# Altium PCB Local_PCB.PcbDoc
Units mm, origin at the board's own origin, x right, y up, seen from the top; angles counter-clockwise.
Board outline 96 x 76 mm, 2 copper layers (Top Layer, Bottom Layer); 18 components, 36 nets, 136 pads, 38 vias.
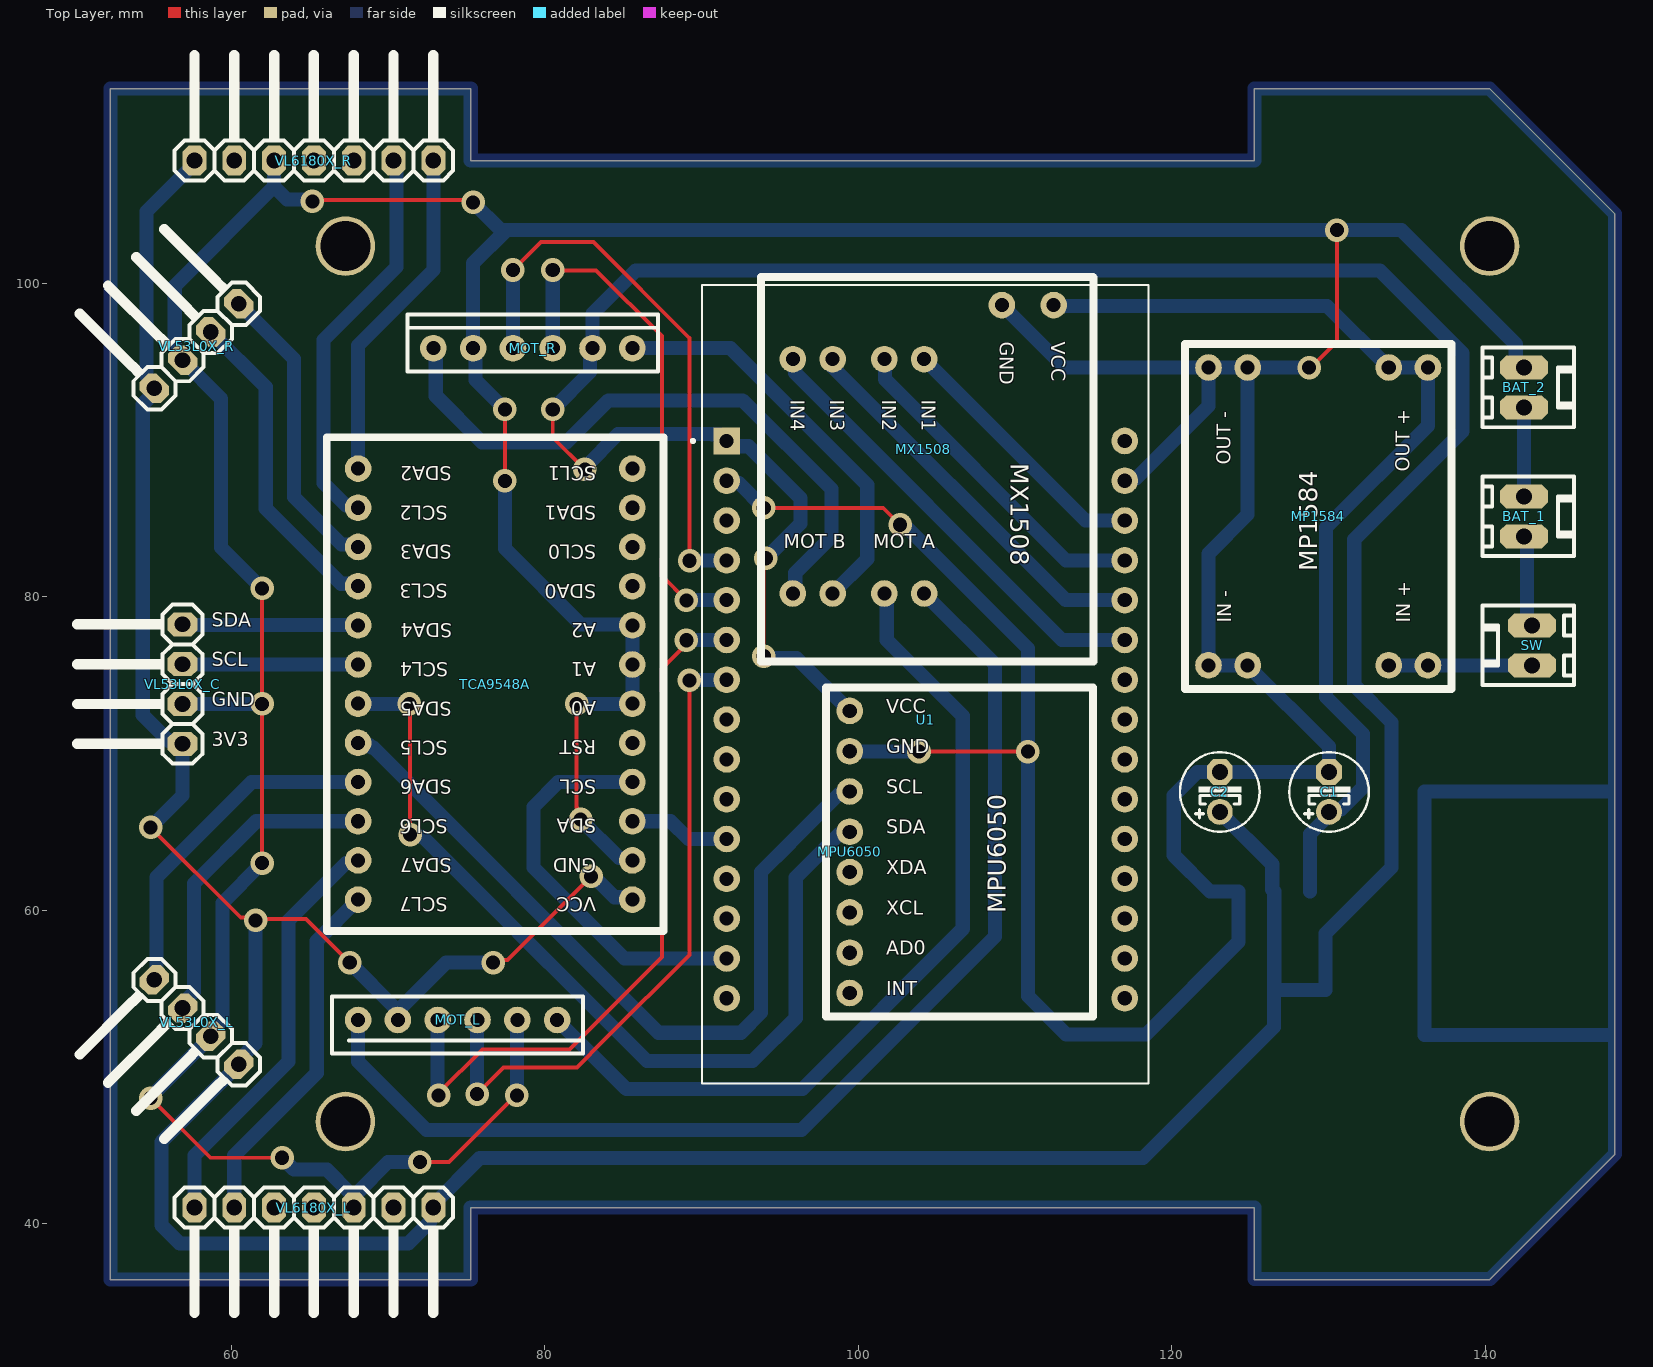
[diagram p0: Top Layer view]
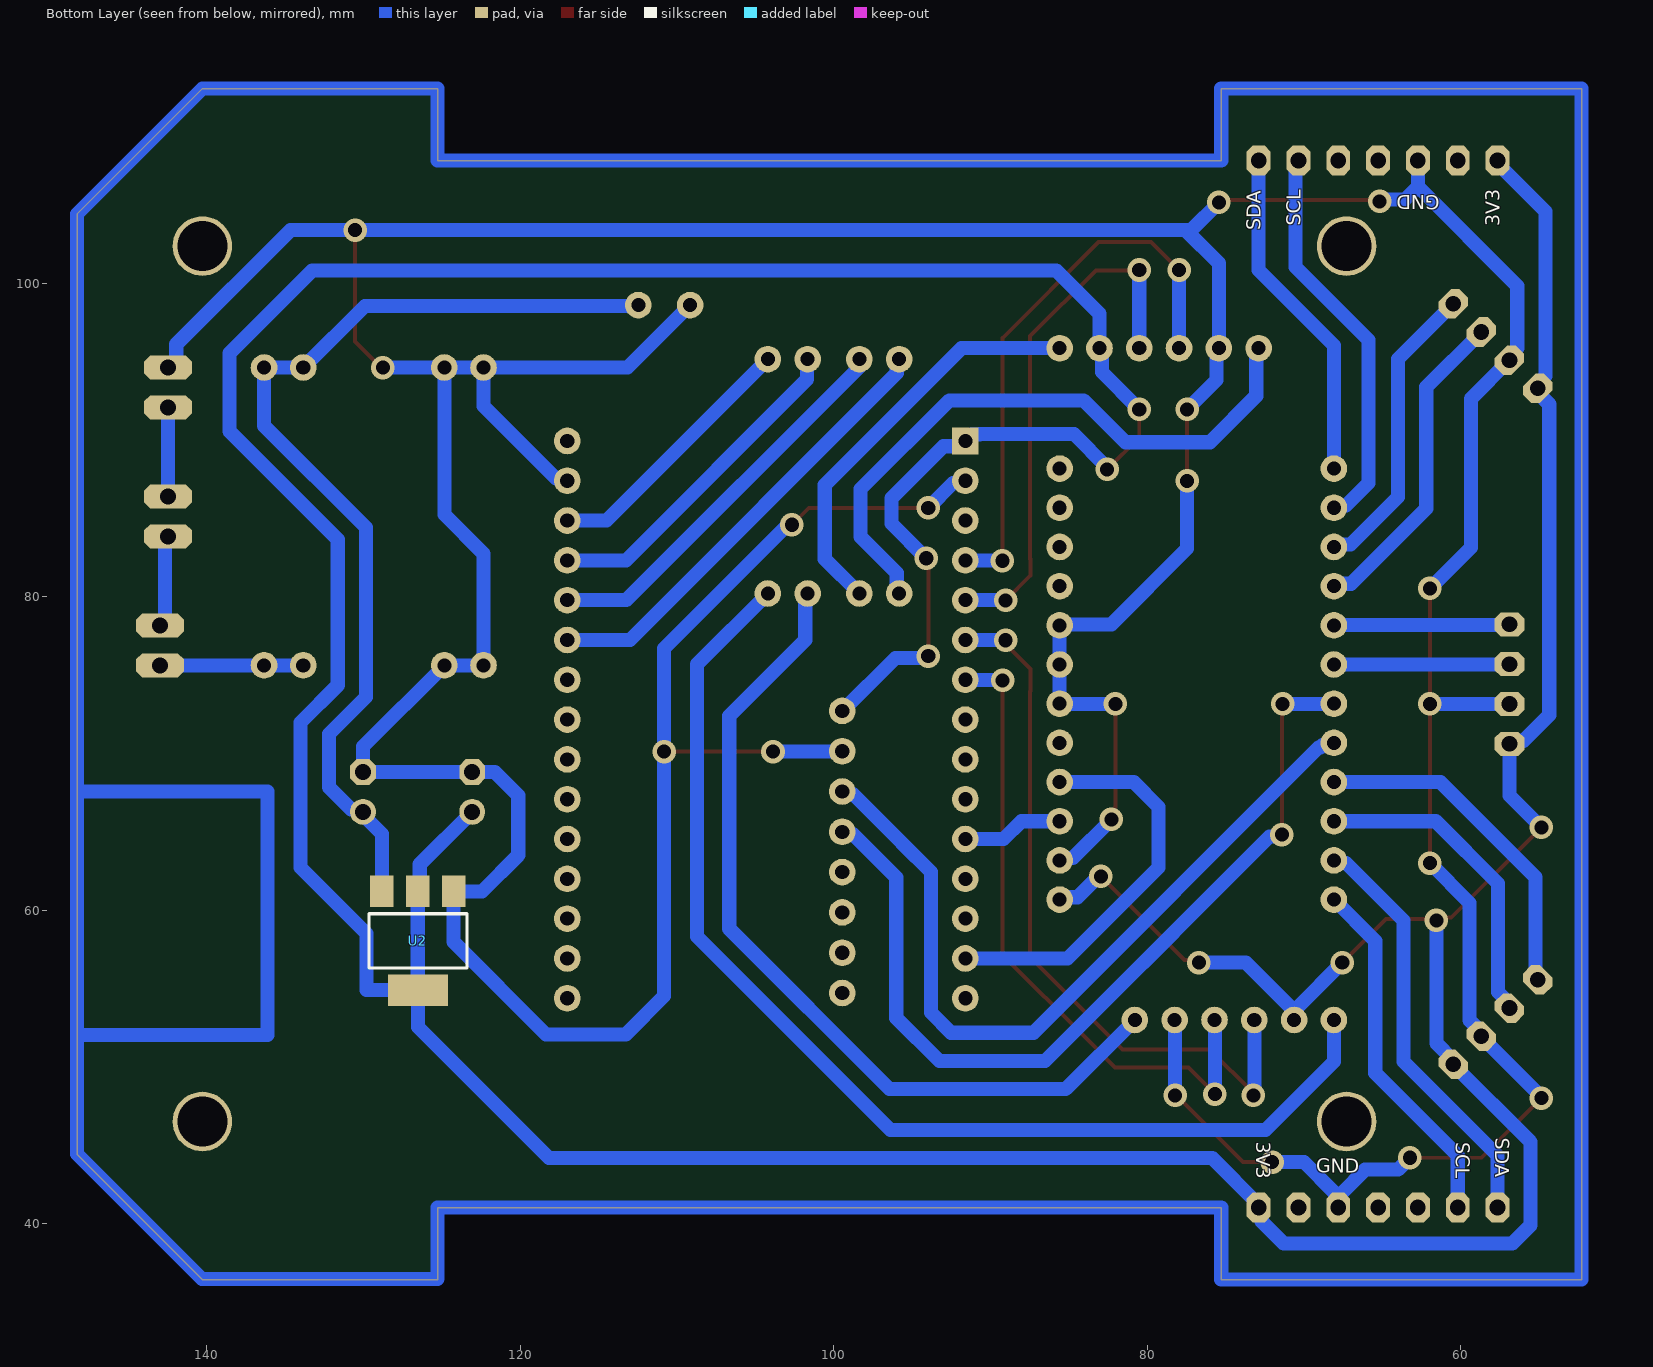
[diagram p1: Bottom Layer view, seen from below]
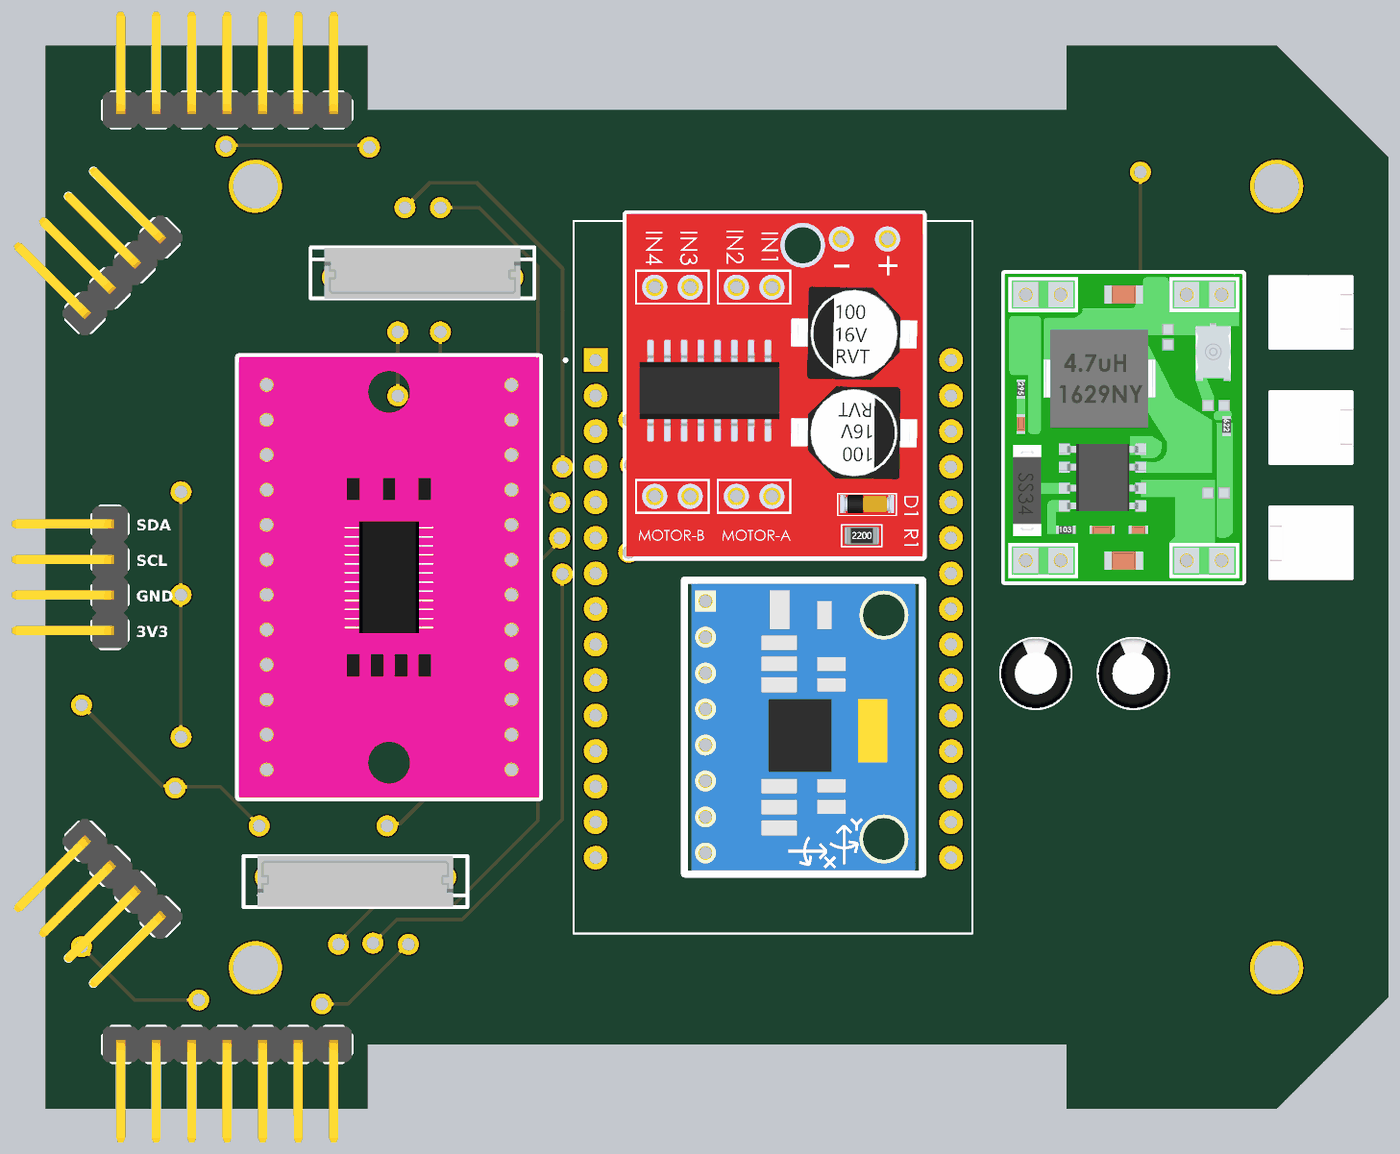
[diagram p2: 3D render of the assembled board from above, using the file's embedded part models]

## Layer stack, top to bottom
Top Solder: solder mask 0.0102, Solder Resist, Dk 3.5
Top Layer: signal copper 0.0356
Dielectric 1: dielectric 0.32, FR-4, Dk 4.8
Bottom Layer: signal copper 0.0356
Bottom Solder: solder mask 0.0102, Solder Resist, Dk 3.5

## Board outline
52.292,36.417 52.292,112.417 75.292,112.417 75.292,107.823 125.292,107.823 125.292,112.417 140.292,112.417 148.292,104.417 148.292,44.417 140.292,36.417 125.292,36.417 125.292,41.021 75.292,41.021 75.292,36.417

## Design rules (kind name [scope] priority, off if disabled: settings)
Clearance [All] p1: gap=0.9 ignorepadtopadclearanceinfootprint=TRUE
ComponentClearance [All] p1: gap=0.254 collisioncheckmode=3 verticalgap=0.254 showdistances=FALSE donotcheckwithout3dbody=TRUE
HoleSize [All] p1: absolutevalues=TRUE maxlimit=4 minlimit=0.9 maxpercent=80.000 minpercent=20.000
PolygonConnect [All] p1: thpad.connectstyle=Direct thpad.reliefconductorwidth=0.254 thpad.reliefentries=4 thpad.polygonreliefangle="90 Angle" thpad.airgapwidth=0.254 smdpad.connectstyle=Relief smdpad.reliefconductorwidth=0.9 smdpad.reliefentries=2 smdpad.polygonreliefangle="90 Angle" smdpad.airgapwidth=0.254 via.connectstyle=Direct via.reliefconductorwidth=0.254 via.reliefentries=4 via.polygonreliefangle="90 Angle" via.airgapwidth=0.254
RoutingVias [All] p1: holewidth=0.9 width=1.5 viastyle="Through Hole" minholewidth=0.9 minwidth=1.5 maxholewidth=0.9 maxwidth=1.5
SolderMaskExpansion [All] p1: expansion=0.102 istentingtop=FALSE
Width [All] p1: maxlimit=0.9 minlimit=0.254 preferedwidth=0.9 toplayer_maxwidth=0.254 toplayer_prefwidth=0.254 bottomlayer_minwidth=0.9 minimp=50.000000 maximp=50.000000 favimp=50.000000
28 further rules are at their usual default settings.

## Components (designator, comment, footprint, x,y, rotation, side; value= is the part's Value field where it differs from the comment)
BAT_1 "Header 2" MY_6410-02 142.494,85.115 r270 top
BAT_2 "Header 2" MY_6410-02 142.494,93.345 r270 top
C1 "10uF" MY_E2.5-5mm 130.048,67.538 r90 top
C2 "10uF" MY_E2.5-5mm 123.079,67.538 r90 top
MOT_L "Header 6" MY_53253-0670#1 69.433,52.985 r0 top
MOT_R "Header 6" MY_53253-0670#2 84.233,95.849 r180 top
MP1584 "MP1584 Mini Adjustable Buck" "MP1584 Mini Adjustable Buck-Footprint-1" 136.358,75.615 r90 top
MPU6050 "MPU6050 Accelerometer and Gyroscope Sensor" "MPU6050 Accelerometer and Gyroscope Sensor-Footprint-1" 99.466,72.707 r0 top
MX1508 "MX1508 Motor Driver" "MX1508 Motor Driver-Footprint-1" 104.216,95.148 r270 top
SW "Header 2" MY_6410-02 143.002,76.885 r90 top
TCA9548A "TCA9548A 1-to-8 I2C Multiplexer Module" "TCA9548A 1-to-8 I2C Multiplexer Module-Footprint-1" 85.598,60.667 r180 top
U1 "ESP32-DEVKIT-V1" MODULE_ESP32_DEVKIT_V1 104.312,74.417 r0 top
U2 "LM1117" MY_SOT223 126.521,57.97 r0 bottom
VL53L0X_C "Header 4" MY_MA04-1W 56.896,74.417 r90 top
VL53L0X_L "Header 4" MY_MA04-1W 57.794,52.849 r135 top
VL53L0X_R "Header 4" MY_MA04-1W 57.794,95.985 r45 top
VL6180X_L "Header 7" MY_MA07-1W 65.278,41.021 r180 top
VL6180X_R "Header 7" MY_MA07-1W 65.278,107.823 r0 top

## Footprints (in the part's own frame and the unit in brackets; to place one, negate y for a bottom-side part, rotate by r counter-clockwise, add the part's x,y. Pads: shape width x height; smd on the part's side, far side on the other; paste and mask are expansions set on the pad)
MODULE_ESP32_DEVKIT_V1 [mm]
  rect 1.7x1.7 hole 0.9: 1(-12.7,15.515)
  round 1.7 hole 0.9: 2(-12.7,12.975) 3(-12.7,10.435) 4(-12.7,7.895) 5(-12.7,5.355) 6(-12.7,2.815) 7(-12.7,0.275) 8(-12.7,-2.265) 9(-12.7,-4.805) 10(-12.7,-7.345) 11(-12.7,-9.885) 12(-12.7,-12.425) 13(-12.7,-14.965) 14(-12.7,-17.505) 15(-12.7,-20.045) 16(12.7,-20.045) 17(12.7,-17.505) 18(12.7,-14.965) 19(12.7,-12.425) 20(12.7,-9.885) 21(12.7,-7.345) 22(12.7,-4.805) 23(12.7,-2.265) 24(12.7,0.275) 25(12.7,2.815) 26(12.7,5.355) 27(12.7,7.895) 28(12.7,10.435) 29(12.7,12.975) 30(12.7,15.515)
  silkscreen extent -14.95,-25.48 14.23,25.48
"MP1584 Mini Adjustable Buck-Footprint-1" [mm]
  round 1.7 hole 0.9: 1(0,2.5) 1(0,0) 2(0,14) 2(0,11.5) 3(19,11.5) 3(19,14) 4(19,0) 4(19,2.5)
  silkscreen extent -1.5,-1.5 20.5,15.5, body extent -1.5,-1.5 20.5,15.5, height 3.6
"MPU6050 Accelerometer and Gyroscope Sensor-Footprint-1" [mm]
  round 1.7 hole 0.9: 1(0,0) 2(0,-2.571) 3(0,-5.143) 4(0,-7.714) 5(0,-10.286) 6(0,-12.857) 7(0,-15.429) 8(0,-18)
  silkscreen extent -1.5,-19.5 15.52,1.5, body extent -1,-19.25 15,1.25, height 3.2
"MX1508 Motor Driver-Footprint-1" [mm]
  round 1.7 hole 0.9: 1(-3.45,8.26) 2(-3.45,4.96) 3(0,0) 4(0,-2.54) 5(0,-5.84) 6(0,-8.38) 7(14.95,0) 8(14.95,-2.54) 9(14.95,-5.84) 10(14.95,-8.38)
  silkscreen extent -5.25,-10.41 19.29,10.8, body extent -5.25,-10.4 19.25,10.8, height 7.76
MY_6410-02 [mil]
  oct 60x120 hole 40: 1(50,0) 2(-50,0)
  silkscreen extent -100,-105 100,125, body extent -102,-102 99,126, height 449
MY_53253-0670#1 [mm]
  round 1.7 hole 0.9: 1(-1.335,0) 2(1.205,0) 3(3.745,0) 4(6.285,0) 5(8.825,0) 6(11.365,0)
  silkscreen extent -2.99,-2.15 13.01,1.5, body extent -2,-2.12 12,1.53, height 5.55
MY_53253-0670#2 [mm]
  round 1.7 hole 0.9: 1(-1.365,0) 2(1.175,0) 3(3.715,0) 4(6.255,0) 5(8.795,0) 6(11.335,0)
  silkscreen extent -3.01,-2.15 12.99,1.5, body extent -2,-2.12 12,1.53, height 5.55
MY_E2.5-5mm [mil]
  round 65 hole 40: +(-50,0)
  oct 65x65 hole 40: -(50,0)
  silkscreen extent -100,-100 100,100, body extent -98,-98 98,98, height 395
MY_MA04-1W [mm]
  oct 1.524x1.905 hole 1: 1(-3.81,0) 2(-1.27,0) 3(1.27,0) 4(3.81,0)
  silkscreen extent -5.08,-1.27 5.08,6.73, body extent -5.08,-1.27 5.08,7, height 4.33
MY_MA07-1W [mm]
  oct 1.524x1.905 hole 1: 1(-7.62,0) 2(-5.08,0) 3(-2.54,0) 4(0,0) 5(2.54,0) 6(5.08,0) 7(7.62,0)
  silkscreen extent -8.89,-1.27 8.89,6.73, body extent -8.89,-1.27 8.89,7, height 4.33
MY_SOT223 [mil]
  rect 59x79 smd: 1(-88.65,-126.69) 2(1.35,-126.69) 3(91.35,-126.69)
  rect 150x79 smd: 2(0.35,121.31)
  silkscreen extent -123,-71 123,65, body extent -128,-145 128,131, height 66
"TCA9548A 1-to-8 I2C Multiplexer Module-Footprint-1" [mm]
  round 1.7 hole 0.9: 1(0,0) 2(0,-2.5) 3(0,-5) 4(0,-7.5) 5(0,-10) 6(0,-12.5) 7(0,-15) 8(0,-17.5) 9(0,-20) 10(0,-22.5) 11(0,-25) 12(0,-27.5) 13(17.5,-27.5) 14(17.5,-25) 15(17.5,-22.5) 16(17.5,-20) 17(17.5,-17.5) 18(17.5,-15) 19(17.5,-12.5) 20(17.5,-10) 21(17.5,-7.5) 22(17.5,-5) 23(17.5,-2.5) 24(17.5,0)
  silkscreen extent -2,-29.5 19.5,2, body extent -2,-29.5 19.5,2, height 2.6

## Part data
BAT_1 BAT_2 SW: "Header, 2-Pin", ASiD Part Number="Header 2-AS"
C1 C2: library part "Cap Pol", "Polar capacitor", ASiD Part Number=C-AS, Volte=25v
MOT_L MOT_R: "Header, 6-Pin", ASiD Part Number="Header 6-AS"
MP1584: library part RBT-0002-2, "MP1584 Mini Adjustable DC-DC Step Down Module can step-down a 4.5 to 28V input voltage to a 0.8 to 20V output at up to 2A."
MPU6050: library part RBT-0003-2, "MPU6050 sensor module is complete 6-axis Motion Tracking Device. It combines 3-axis Gyroscope, 3-axis Accelerometer and Digital Motion Processor all in small package."
MX1508: library part RBT-0001-2, "MX1508 Dual H Bridge DC PWM Stepper Motor Driver module."
TCA9548A: library part RBT-0004-4, "An 8-channel I2C multiplexer which is useful to allow multiple I2C devices with the same address to share a single I2C bus."
U1: "Dual core, Wi-Fi: 2.4 GHz up to 150 Mbits/s,BLE (Bluetooth Low Energy) and legacy Bluetooth, 32 bits, Up to 240 MHz", Package=None, Availability=Unavailable, MF="{'manufacturer': u'Do it'}", MP=ESP32-DEVKIT-V1, Price=None
U2: "Low Drop Voltage Reg", ASiD Part Number=LM1117-AS
VL53L0X_C VL53L0X_L VL53L0X_R: "Header, 4-Pin", ASiD Part Number="Header 4-AS"
VL6180X_L VL6180X_R: "Header, 8-Pin, Dual row", ASiD Part Number="Header 7-AS"

## Free pads (board coordinates)
  round 3.8 hole 3.2: M1(67.292,102.365) M2(67.292,46.507) M3(140.292,102.365) M4(140.292,46.507)

## Via types
v1: diameter 1.5, hole 0.9, Top Layer to Bottom Layer, 38 vias

## Nets (pads, with @x,y where several pads share a name; then routed paths per layer and width w, separated by ;. In a path a pad name is that pad's centre, name@x,y a point inside that pad or via, vN(x,y) a via of type N, cw(c..) or ccw(c..) an arc to the next point about the centre after c; other vN are vias at no path point)
+3V3: C2.+ MOT_L.2 MOT_R.2 MPU6050.1 TCA9548A.1 U1.1 U2.2 VL53L0X_C.1 VL53L0X_L.1 VL53L0X_R.1 VL6180X_L.1 VL6180X_R.1 | length 356.4
  Top Layer w0.254: v1(54.864,65.278) 60.632,59.51 61.394,59.51 v1(61.559,59.345) v1@61.468,59.436 ; v1@61.559,59.436 64.77,59.436 v1(67.564,56.642) ; v1(76.708,56.642) 76.873,56.807 77.635,56.807 v1(82.97,62.142) ; v1(80.518,91.948) 80.518,90.161 v1(82.568,88.111) ; v1(93.98,76.2) 93.959,76.221 93.959,82.296 v1(94.109,82.446)
  Bottom Layer w0.9: v1(54.864,65.278) 56.896,67.31 VL53L0X_C.1 56.701,70.802 55.999,70.802 54.356,72.444 54.356,92.271 55.1,93.015 VL53L0X_R.1 55.1,93.566 54.599,94.067 54.599,98.592 54.603,98.596 54.603,104.578 57.658,107.632 VL6180X_R.1 ; v1(61.559,59.345) 61.559,51.501 60.488,50.43 VL53L0X_L.1 55.546,45.213 55.546,39.89 56.718,38.718 71.298,38.718 72.703,40.124 72.703,40.826 VL6180X_L.1 72.898,41.212 75.86,44.174 118.169,44.174 126.53,52.535 U2.2@126.53,54.889 ; v1(67.564,56.642) 70.485,53.721 70.485,53.138 MOT_L.2 ; MOT_L.2@70.791,53.709 73.724,56.642 v1(76.708,56.642) ; v1(80.518,91.948) 82.905,94.335 82.905,95.696 MOT_R.2 83.058,98.044 85.812,100.798 133.286,100.798 138.558,95.526 138.558,90.552 131.658,83.652 131.658,74.342 134.024,71.976 134.024,62.708 129.819,58.503 129.819,54.889 U2.2@126.53,54.889 ; v1(82.568,88.111) 82.568,88.249 84.687,90.367 90.685,90.367 90.72,90.332 91.212,90.332 91.952,89.592 93.017,89.592 96.334,86.275 96.334,84.664 94.116,82.446 v1(94.109,82.446) ; v1(82.97,62.142) 83.132,62.142 84.454,60.82 85.445,60.82 TCA9548A.1 ; v1(93.98,76.2) 94.087,76.093 96.08,76.093 MPU6050.1 ; C2.+ 126.426,62.921 126.426,61.317 126.556,61.188 126.556,54.914 U2.2@126.53,54.889
+6V: C1.+ MP1584.4 MX1508.1 U2.3 | length 64.3
  Bottom Layer w0.9: MX1508.1@112.498,98.552 129.921,98.552 133.858,94.615 136.358,94.615 136.358,90.898 129.858,84.398 129.858,73.596 132.224,71.231 132.224,67.836 130.799,66.412 130.192,66.412 C1.+ 130.048,66.065 128.842,64.859 U2.3
+7.4V: BAT_1.1 SW.1 | length 5.9
  Bottom Layer w0.9: BAT_1.1 142.69,83.649 142.69,78.467 SW.1
D12: MX1508.4 U1.27 | length 21.4
  Bottom Layer w0.9: MX1508.4 101.71,95.115 101.71,93.87 113.268,82.312 U1.27
D13: MX1508.3 U1.28 | length 17.1
  Bottom Layer w0.9: MX1508.3 114.513,84.852 U1.28
D14: MX1508.5 U1.26 | length 24.8
  Bottom Layer w0.9: MX1508.5@98.379,94.643 113.25,79.772 U1.26
D27: MX1508.6 U1.25 | length 29
  Bottom Layer w0.9: MX1508.6 95.989,94.995 95.989,94.257 113.014,77.232 U1.25
ENC_LA: MOT_L.3 U1.6 | length 45.9
  Top Layer w0.254: v1(73.235,48.177) 73.235,48.316 76.027,51.108 81.575,51.108 87.475,57.008 87.475,73.944 87.459,73.961 87.459,75.387 89.05,76.977 v1(89.05,77.216)
  Bottom Layer w0.9: MOT_L.3 73.165,52.972 73.165,48.247 v1(73.235,48.177) ; v1@89.408,77.216 89.424,77.232 U1.6
ENC_LB: MOT_L.4 U1.7 | length 41.8
  Top Layer w0.254: v1(75.692,48.26) 77.386,49.954 82.053,49.954 83.829,51.73 89.236,57.137 v1(89.236,74.651)
  Bottom Layer w0.9: v1(75.692,48.26) MOT_L.4@75.692,52.959 ; v1(89.236,74.651) 89.257,74.671 91.592,74.671 U1.7
ENC_RA: MOT_R.3 U1.5 | length 33.4
  Top Layer w0.254: v1(80.518,100.838) 80.536,100.82 83.281,100.82 87.475,96.626 87.475,82.39 87.472,82.386 87.472,81.334 v1(89.05,79.756)
  Bottom Layer w0.9: MOT_R.3 v1(80.518,100.838) ; v1@89.408,79.756 89.424,79.772 U1.5
ENC_RB: MOT_R.4 U1.4 | length 36.1
  Top Layer w0.254: v1(77.978,100.838) 79.755,102.615 83.118,102.615 89.249,96.484 v1(89.249,82.284)
  Bottom Layer w0.9: MOT_R.4 v1(77.978,100.838) ; v1(89.249,82.284) 89.263,82.298 91.598,82.298 U1.4
GND: BAT_2.2 C1.- C2.- MOT_L.5 MOT_R.5 MP1584.2 MP1584.3 MPU6050.2 MX1508.2 TCA9548A.2 TCA9548A.6 TCA9548A.7 TCA9548A.8 U1.2 U1.29 U2.1 VL53L0X_C.2 VL53L0X_L.2 VL53L0X_R.2 VL6180X_L.3 VL6180X_R.3 | length 413.4
  Top Layer w0.254: v1(54.864,48.006) 58.674,44.196 v1(63.246,44.196) ; v1(61.976,62.992) v1(61.976,80.518) ; v1(65.183,105.22) 65.254,105.292 75.302,105.292 v1(75.438,105.156) ; v1(72.037,43.919) 73.891,43.919 78.149,48.177 v1(78.232,48.177) ; v1(77.47,87.376) v1(77.47,91.948) ; v1(82.042,73.152) 82.042,66.558 82.058,66.542 82.058,66.024 v1(82.296,65.786) ; v1(93.977,85.662) 101.604,85.662 v1(102.684,84.582) ; v1(103.886,70.104) v1(110.834,70.104) ; v1@128.778,94.488 130.556,96.266 v1(130.556,103.378)
  Bottom Layer w0.9: v1(54.864,48.006) 54.864,48.065 58.692,51.893 VL53L0X_L.2 58.692,52.226 59.436,52.97 59.436,60.452 v1(61.976,62.992) ; VL53L0X_C.2 56.899,73.15 61.974,73.15 v1(61.976,73.152) ; v1(61.976,80.518) 59.36,83.134 59.36,92.622 VL53L0X_R.2 56.896,95.362 56.399,95.859 56.399,97.846 56.403,97.85 56.403,99.822 62.738,106.157 ; VL6180X_R.3 62.738,106.157 ; v1(63.246,44.196) 64.008,43.434 66.108,43.434 VL6180X_L.3@67.623,41.918 ; v1(65.183,105.22) 65.068,105.335 63.56,105.335 62.738,106.157 ; VL6180X_L.3 68.013,41.216 68.013,41.918 70.011,43.917 72.036,43.917 v1(72.037,43.919) ; v1(75.438,105.156) 77.216,103.378 77.548,103.378 ; v1(77.47,87.376) 77.47,83.058 82.296,78.232 85.533,78.232 TCA9548A.8 TCA9548A.7 TCA9548A.6 85.59,73.16 82.05,73.16 v1(82.042,73.152) ; v1(77.47,91.948) 75.591,93.827 75.591,95.696 MOT_R.5 75.438,101.268 77.548,103.378 ; v1(78.232,48.177) 78.245,48.19 78.245,52.972 MOT_L.5 ; v1(82.296,65.786) 84.762,63.32 85.445,63.32 TCA9548A.2 ; U1.2 91.765,87.239 92.4,87.239 v1(93.977,85.662) ; MPU6050.2 99.482,70.12 103.87,70.12 v1(103.886,70.104) ; v1(102.684,84.582) 102.799,84.467 103.059,84.467 110.834,76.692 v1(110.834,70.104) 110.834,54.52 113.284,52.07 118.364,52.07 124.27,57.976 U2.1 122.454,61.188 120.142,63.5 120.142,67.31 121.64,68.808 C1.- 130.048,70.425 124.858,75.615 122.358,75.615 122.358,82.734 124.858,85.234 MP1584.3@124.858,94.615 ; MX1508.2 113.16,94.615 MP1584.3@122.358,94.615 ; U1.29 117.165,87.545 117.737,87.545 122.358,92.166 MP1584.3@122.358,94.615 ; v1(128.778,94.615) MP1584.3@124.858,94.615 ; BAT_2.2 142.275,94.615 141.963,94.927 141.963,96.098 134.683,103.378 v1(130.556,103.378) 77.548,103.378 ; MP1584.3@122.358,94.615 MP1584.3@124.858,94.615
ML+: MOT_L.1 MX1508.7 | length 74
  Bottom Layer w0.9: MOT_L.1 68.098,50.344 72.468,45.974 96.39,45.974 108.734,58.318 108.734,75.681 MX1508.7
ML-: MOT_L.6 MX1508.8 | length 55.4
  Bottom Layer w0.9: MOT_L.6 85.211,48.572 96.442,48.572 106.68,58.81 106.68,72.39 101.829,77.241 101.829,80.045 MX1508.8
MR+: MOT_R.1 MX1508.9 | length 26.4
  Bottom Layer w0.9: MOT_R.1 91.852,95.849 100.584,87.116 100.584,82.406 MX1508.9
MR-: MOT_R.6 MX1508.10 | length 40.7
  Bottom Layer w0.9: MOT_R.6 73.051,95.696 73.051,92.811 76.014,89.848 81.388,89.848 84.064,92.524 92.631,92.524 98.298,86.857 98.298,83.82 95.989,81.511 95.989,80.351 MX1508.10
NetBAT_1_2: BAT_1.2 BAT_2.1 | length 5.7
  Bottom Layer w0.9: BAT_1.2 BAT_2.1
NetMP1584_1: MP1584.1 SW.2 | length 9.1
  Bottom Layer w0.9: MP1584.1@133.858,75.615 136.358,75.615 SW.2
SCL: TCA9548A.4 U1.14 | length 25.6
  Bottom Layer w0.9: TCA9548A.4 80.867,68.167 79.281,66.581 79.281,62.716 85.085,56.912 U1.14
SCL0: TCA9548A.10
SCL1: TCA9548A.12
SCL2: TCA9548A.14 VL6180X_R.6 | length 25.4
  Bottom Layer w0.9: TCA9548A.14 67.945,85.82 67.334,85.82 65.898,87.256 65.898,96.375 70.542,101.019 70.542,107.639 VL6180X_R.6
SCL3: TCA9548A.16 VL53L0X_R.3 | length 20.7
  Bottom Layer w0.9: VL53L0X_R.3 62.208,93.367 62.208,85.614 67.002,80.82 67.945,80.82 TCA9548A.16
SCL4: TCA9548A.18 VL53L0X_C.3 | length 11.2
  Bottom Layer w0.9: VL53L0X_C.3 56.906,75.677 68.088,75.677 TCA9548A.18
SCL5: MPU6050.3 TCA9548A.20 | length 50.7
  Bottom Layer w0.9: TCA9548A.20 68.251,70.514 68.817,70.514 68.964,70.367 69.073,70.367 87.268,52.172 92.524,52.172 93.812,53.461 93.812,62.424 95.648,64.26 95.648,64.286 98.773,67.411 99.313,67.411 MPU6050.3
SCL6: TCA9548A.22 VL53L0X_L.3 | length 20.4
  Bottom Layer w0.9: VL53L0X_L.3 56.896,54.022 57.636,54.762 57.636,61.7 61.603,65.667 TCA9548A.22
SCL7: TCA9548A.24 VL6180X_L.6 | length 22.9
  Bottom Layer w0.9: VL6180X_L.6 60.198,44.333 65.459,49.593 65.459,58.028 TCA9548A.24
SDA: TCA9548A.3 U1.11 | length 6.5
  Bottom Layer w0.9: TCA9548A.3 88.038,65.667 89.173,64.532 U1.11
SDA0: TCA9548A.9
SDA1: TCA9548A.11
SDA2: TCA9548A.13 VL6180X_R.7 | length 21.6
  Bottom Layer w0.9: TCA9548A.13 68.098,96.029 72.898,100.829 VL6180X_R.7
SDA3: TCA9548A.15 VL53L0X_R.4 | length 19
  Bottom Layer w0.9: VL53L0X_R.4@60.615,98.552 64.008,95.159 64.008,86.36 67.048,83.32 67.945,83.32 TCA9548A.15
SDA4: TCA9548A.17 VL53L0X_C.4 | length 11.2
  Bottom Layer w0.9: VL53L0X_C.4 56.926,78.197 68.068,78.197 TCA9548A.17
SDA5: MPU6050.4 TCA9548A.19 | length 57
  Top Layer w0.254: v1(71.374,73.152) 71.413,73.113 v1(71.413,64.809)
  Bottom Layer w0.9: TCA9548A.19 68.106,73.16 71.366,73.16 v1(71.374,73.152) ; v1(71.413,64.809) 71.528,64.694 72.2,64.694 77.599,59.295 78.949,57.946 81.709,55.185 86.522,50.372 93.269,50.372 96.021,53.124 96.021,62.088 98.773,64.84 99.313,64.84 MPU6050.4
SDA6: TCA9548A.21 VL53L0X_L.4 | length 22
  Bottom Layer w0.9: VL53L0X_L.4 55.235,55.678 55.235,62.093 61.309,68.167 TCA9548A.21
SDA7: TCA9548A.23 VL6180X_L.7 | length 26.8
  Bottom Layer w0.9: VL6180X_L.7 57.658,44.338 63.659,50.339 63.659,59.339 67.334,63.014 67.945,63.014 TCA9548A.23
pads on no net: MPU6050.5 MPU6050.6 MPU6050.7 MPU6050.8 TCA9548A.5 U1.3 U1.8 U1.9 U1.10 U1.12 U1.13 U1.15 U1.16 U1.17 U1.18 U1.19 U1.20 U1.21 U1.22 U1.23 U1.24 U1.30 VL6180X_L.2 VL6180X_L.4 VL6180X_L.5 VL6180X_R.2 VL6180X_R.4 VL6180X_R.5
copper on no net: | length 392.8
  Bottom Layer w0.762: 148.26,51.994 148.285,52.019
  Bottom Layer w0.9: 148.285,52.019 136.144,52.019 136.144,67.564 148.285,67.564 ; 148.285,67.564 148.285,44.425 140.31,36.449 125.324,36.449 125.298,36.474 125.298,41.021 75.286,41.021 75.286,36.424 52.299,36.424 52.299,112.42 75.286,112.42 75.286,107.823 125.298,107.823 125.298,112.42 140.284,112.42 148.285,104.419 148.285,67.564

## Silkscreen, mask and mechanical layers (free items; w line width, h text height)
Top Overlay:
  text "SDA" at 58.768,77.768 h1.52
  text "SCL" at 58.768,75.229 h1.52
  text "GND" at 58.768,72.69 h1.52
  text "3V3" at 58.768,70.148 h1.52
Bottom Overlay:
  text "GND" at 61.345,105.931 h1.52 r180
  text "SCL" at 69.9,103.647 h1.52 r270
  text "3V3" at 57.199,103.615 h1.52 r270
  text "SDA" at 72.439,103.373 h1.52 r270
  text "SDA" at 58.117,45.471 h1.52 r90
  text "3V3" at 73.357,45.229 h1.52 r90
  text "SCL" at 60.656,45.197 h1.52 r90
  text "GND" at 69.211,42.913 h1.52

## Text inside footprints (layer, text, board x,y; h text height)
MP1584: Top Overlay "OUT +" at 135.53,87.98 h1.52 r90; Top Overlay "OUT -" at 124.1,88.416 h1.52 r90; Top Overlay "IN -" at 124.12,78.328 h1.52 r90; Top Overlay "IN +" at 135.55,78.328 h1.52 r90
MPU6050: Top Overlay "INT" at 101.798,54.248 h1.52; Top Overlay "AD0" at 101.798,56.819 h1.52; Top Overlay "XCL" at 101.798,59.392 h1.52; Top Overlay "XDA" at 101.798,61.962 h1.52; Top Overlay "SDA" at 101.798,64.534 h1.52; Top Overlay "SCL" at 101.798,67.106 h1.52; Top Overlay "GND" at 101.798,69.678 h1.52; Top Overlay "VCC" at 101.798,72.249 h1.52
MX1508: Top Overlay "MOT B" at 95.273,82.768 h1.52; Top Overlay "MOT A" at 100.96,82.768 h1.52; Top Overlay "VCC" at 112.018,96.245 h1.52 r270; Top Overlay "IN4" at 95.379,92.574 h1.52 r270; Top Overlay "IN3" at 97.917,92.574 h1.52 r270; Top Overlay "IN2" at 101.209,92.574 h1.52 r270; Top Overlay "IN1" at 103.757,92.574 h1.52 r270; Top Overlay "GND" at 108.719,96.245 h1.52 r270
TCA9548A: Top Overlay "GND" at 83.298,63.63 h1.52 r180; Top Overlay "SDA" at 83.298,66.133 h1.52 r180; Top Overlay "SCL" at 83.298,68.637 h1.52 r180; Top Overlay "RST" at 83.298,71.139 h1.52 r180; Top Overlay "A0" at 83.298,73.647 h1.52 r180; Top Overlay "A1" at 83.298,76.117 h1.52 r180; Top Overlay "A2" at 83.298,78.603 h1.52 r180; Top Overlay "SDA0" at 83.298,81.111 h1.52 r180; Top Overlay "SCL0" at 83.298,83.619 h1.52 r180; Top Overlay "SDA1" at 83.298,86.121 h1.52 r180; Top Overlay "SCL1" at 83.298,88.625 h1.52 r180; Top Overlay "SDA7" at 74.067,63.623 h1.52 r180; Top Overlay "SCL6" at 73.825,66.123 h1.52 r180; Top Overlay "SDA6" at 74.081,68.624 h1.52 r180; Top Overlay "SCL5" at 73.809,71.125 h1.52 r180; Top Overlay "SDA5" at 74.066,73.625 h1.52 r180; Top Overlay "SCL4" at 73.841,76.124 h1.52 r180; Top Overlay "SDA4" at 74.098,78.622 h1.52 r180; Top Overlay "SCL3" at 73.808,81.126 h1.52 r180; Top Overlay "SDA3" at 74.064,83.629 h1.52 r180; Top Overlay "SCL2" at 73.83,86.128 h1.52 r180; Top Overlay "SDA2" at 74.087,88.626 h1.52 r180; Top Overlay "SCL7" at 73.81,61.125 h1.52 r180; Top Overlay "VCC" at 83.298,61.125 h1.52 r180